# Altium PCB BlasterV1.3L64.PcbDoc
Units mm, origin at the board's own origin, x right, y up, seen from the top; angles counter-clockwise.
Board outline 45.95 x 23.95 mm, 2 copper layers (Top Layer, Bottom Layer); 22 components, 32 nets, 144 pads, 59 vias.
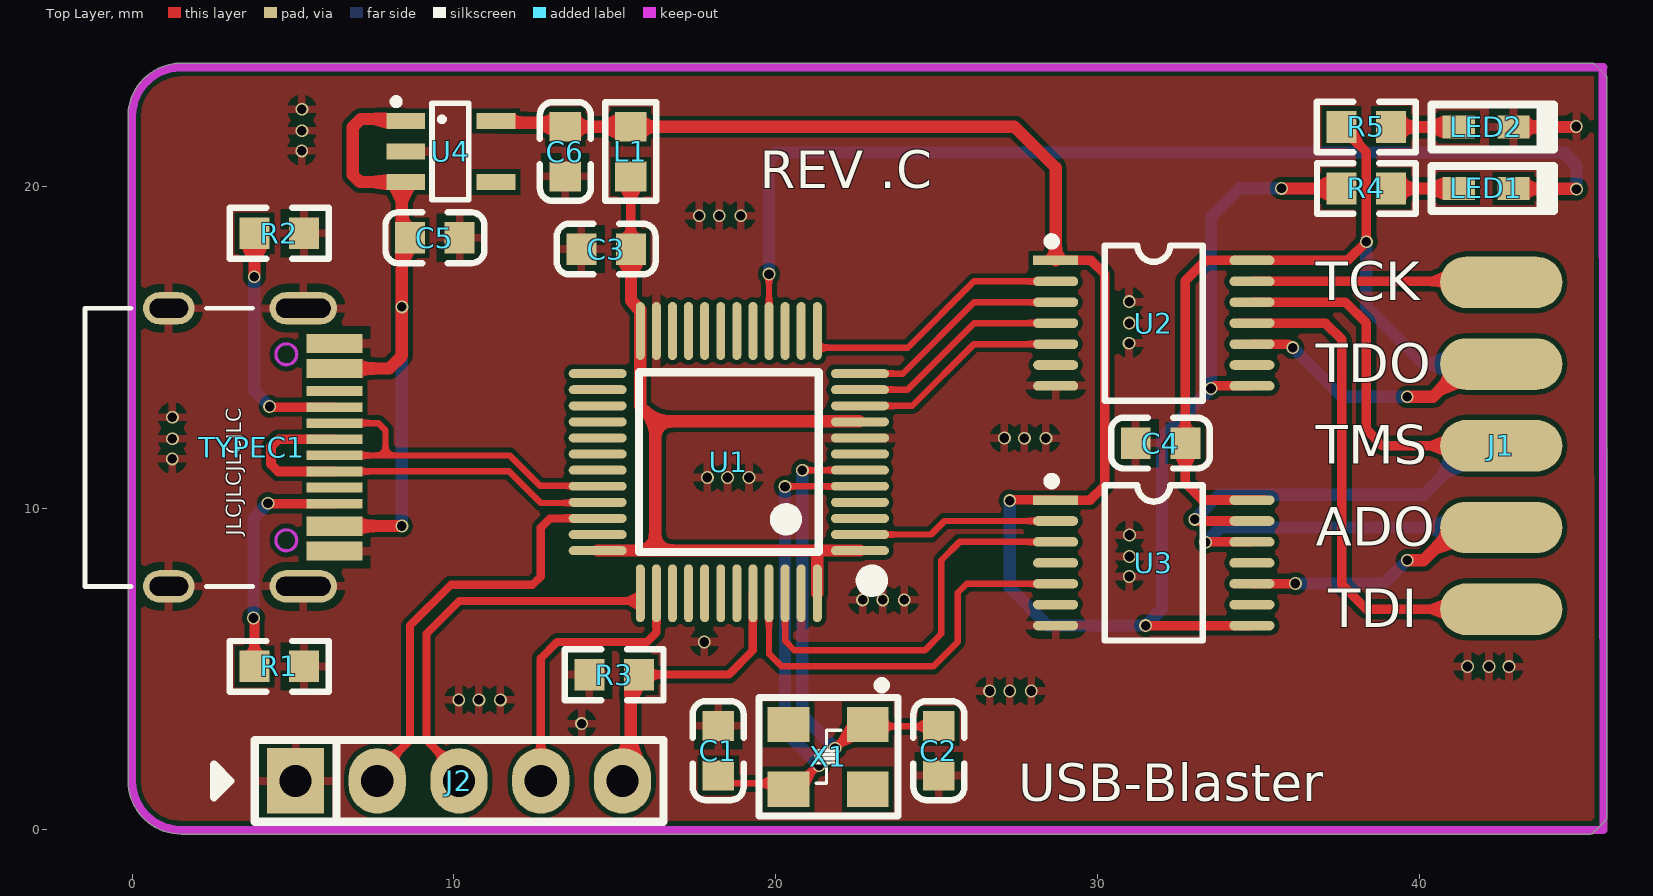
[diagram p0: Top Layer view]
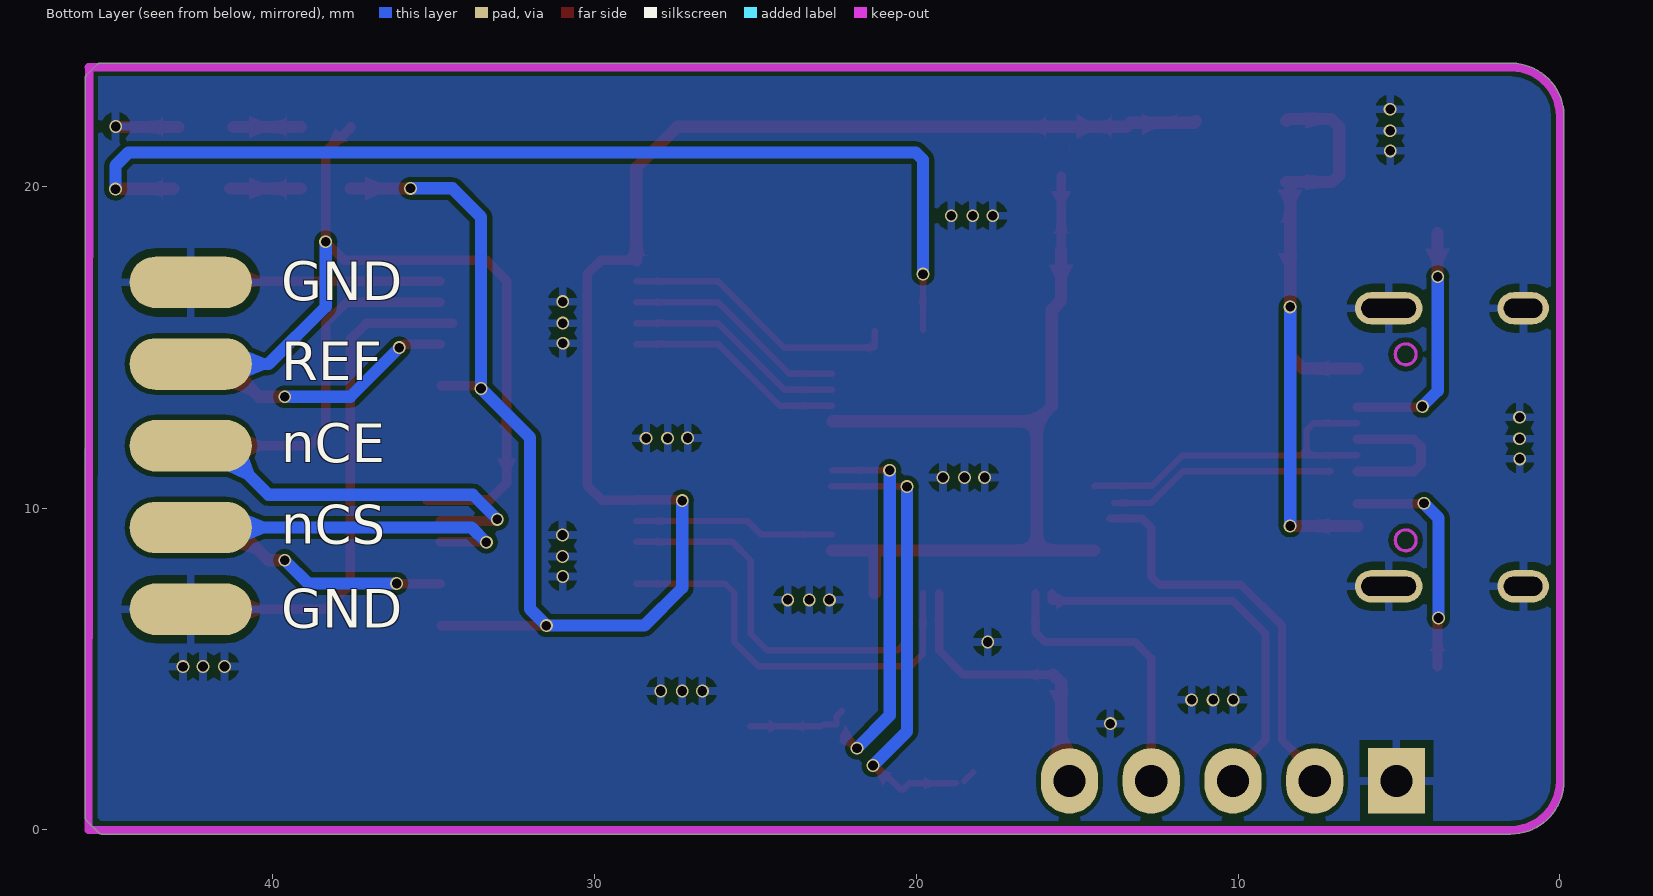
[diagram p1: Bottom Layer view, seen from below]
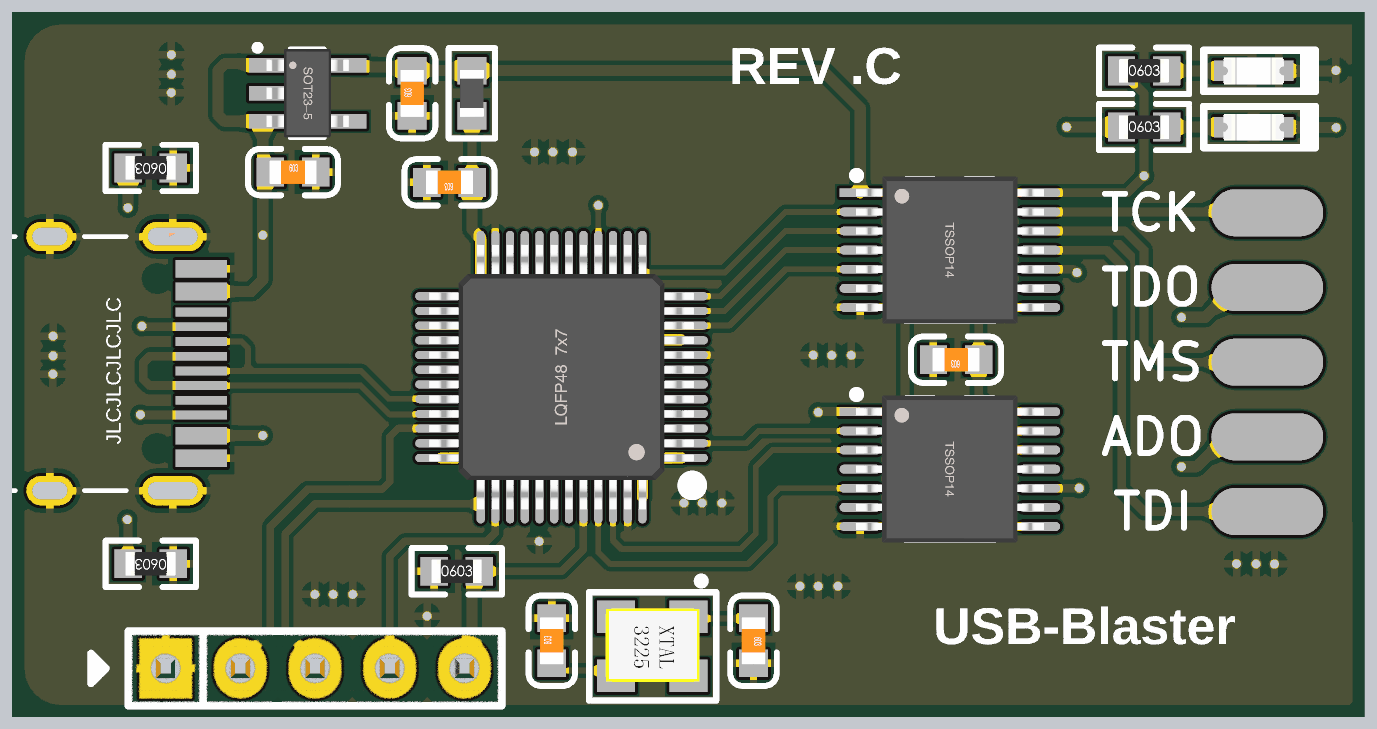
[diagram p2: 3D render of the assembled board from above, using the file's embedded part models]

## Layer stack, top to bottom
Top Solder: solder mask 0.0102, Solder Resist, Dk 3.5
Top Layer: signal copper 0.0356
Dielectric 1: dielectric 0.32, FR-4, Dk 4.8
Bottom Layer: signal copper 0.0356
Bottom Solder: solder mask 0.0102, Solder Resist, Dk 3.5

## Board outline
-0.127,1.524 -0.127,22.303 cw(c0,22.303) -0.118,22.351 cw(c1.524,22.176) 1.349,23.818 cw(c1.397,23.7) 1.397,23.827 45.368,23.827 cw(c45.368,23.7) 45.458,23.79 45.79,23.458 45.79,23.459 cw(c45.7,23.368) 45.827,23.368 45.827,0.381 cw(c45.7,0.381) 45.79,0.29 45.79,0.291 45.409,-0.09 45.41,-0.09 cw(c45.319,0) 45.319,-0.127 1.524,-0.127 cw(c1.524,1.524)

## Design rules (kind name [scope] priority, off if disabled: settings)
Clearance [All] p1: gap=0.15 ignorepadtopadclearanceinfootprint=FALSE
PolygonConnect [All] p1: connectstyle=Relief reliefconductorwidth=0.254 reliefentries=4 polygonreliefangle="90 Angle" airgapwidth=0.254
RoutingVias [All] p1: holewidth=0.711 width=1.27 viastyle="Through Hole" minholewidth=0.3 minwidth=0.4 maxholewidth=0.711 maxwidth=1.27
SolderMaskExpansion [All] p1: expansion=0.102 istentingtop=FALSE
SupplyNets "Schematic Supply Nets_3" [InNet('+5')] p1: voltage=0.000
SupplyNets "Schematic Supply Nets_2" [InNet('+3.3')] p2: voltage=0.000
SupplyNets "Schematic Supply Nets_1" [InNet('GND')] p3: voltage=0.000
SupplyNets "Schematic Supply Nets" [InNet('VREF')] p4: voltage=0.000
Width [All] p1: maxlimit=0.762 minlimit=0.2 preferedwidth=0.381
30 further rules are at their usual default settings.

## Components (designator, comment, footprint, x,y, rotation, side; value= is the part's Value field where it differs from the comment)
C1 "20pF" LC-0603_C 18.212,2.464 r90 top
C2 "20pF" LC-0603_C 25.07,2.464 r270 top
C3 "1uF" LC-0603_C 14.731,18.052 r180 top
C4 "1uF" LC-0603_C 31.959,12.021 r180 top
C5 "1uF" LC-0603_C 9.41,18.402 r0 top
C6 "1uF" LC-0603_C 13.462,21.082 r90 top
J1 "HDR2x5" HDR-M-2.54_2X5_SMT 42.545,11.938 r0 top locked
J2 "HDR1x5  DNP" PIN-5-2.54-1.0 10.16,1.524 r0 top locked
L1 "BLM21PG121SN1D" LC-0603_L 15.494,21.082 r270 top
LED1 "LED-A" LED-0603 42.076,19.933 r0 top
LED2 "LED-B" LED-0603 42.076,21.844 r0 top
R1 "5.1K" LC-0603_R 4.572,5.08 r180 top
R2 "5.1K" LC-0603_R 4.572,18.542 r180 top
R3 "5.1K" LC-0603_R 14.978,4.826 r0 top
R4 "1K" LC-0603_R 38.355,19.933 r0 top
R5 "1K" LC-0603_R 38.354,21.844 r0 top
TYPEC1 "TYPEC16P-SMD" TYPE-C-Receptacle-2.0 -1.459,11.89 r270 top locked
U1 "AGRV2KL48" "LQFP48 7X7_N" 18.542,11.43 r90 top
U2 "TXU0304" TSSOP14_N 31.75,15.748 r0 top
U3 "TXU0304" TSSOP14_N 31.748,8.3 r0 top
U4 "LP5907" SOT23-5N 9.906,21.082 r270 top
X1 "XTAL-3225" XTAL-3225 22.784,3.226 r270 top

## Footprints (in the part's own frame and the unit in brackets; to place one, negate y for a bottom-side part, rotate by r counter-clockwise, add the part's x,y. Pads: shape width x height; smd on the part's side, far side on the other; paste and mask are expansions set on the pad)
HDR-M-2.54_2X5_SMT [mm] "Pin Header"
  oval 3.8x1.6 smd: 1(0,5.08) 3(0,2.54) 5(0,0) 7(0,-2.54) 9(0,-5.08)
  oval 3.8x1.6 smd far side: 2(0,5.08) 4(0,2.54) 6(0,0) 8(0,-2.54) 10(0,-5.08)
LC-0603_C [mm]
  rect 0.93x0.98 smd: 1(-0.77,0) 2(0.77,0)
  silkscreen extent -1.53,-0.79 1.54,0.79, body extent -0.8,-0.4 0.8,0.4, height 0.3
LC-0603_L [mm]
  rect 0.93x0.98 smd: 1(-0.77,0) 2(0.77,0)
  silkscreen extent -1.53,-0.79 1.54,0.79, body extent -0.82,-0.41 0.83,0.41, height 0.46
LC-0603_R [mm]
  rect 0.93x0.98 smd: 1(-0.77,0) 2(0.77,0)
  silkscreen extent -1.53,-0.79 1.54,0.79, body extent -0.85,-0.4 0.85,0.4, height 0.56
LED-0603 [mm] "LED, SMD, 0603"
  rect 1x0.7 smd: 1(-0.85,0) 2(0.85,0)
  silkscreen extent -1.7,-0.7 2.1,0.7, body extent -1.03,-0.46 1.03,0.45, height 0.85
"LQFP48 7X7_N" [mm] "48脚，体宽7x7mm，脚距0.5mm"
  oval 0.279x1.8 smd: 1(-2.75,-4.075) 2(-2.25,-4.075) 3(-1.75,-4.075) 4(-1.25,-4.075) 5(-0.75,-4.075) 6(-0.25,-4.075) 7(0.25,-4.075) 8(0.75,-4.075) 9(1.25,-4.075) 10(1.75,-4.075) 11(2.25,-4.075) 12(2.75,-4.075) 25(2.75,4.075) 26(2.25,4.075) 27(1.75,4.075) 28(1.25,4.075) 29(0.75,4.075) 30(0.25,4.075) 31(-0.25,4.075) 32(-0.75,4.075) 33(-1.25,4.075) 34(-1.75,4.075) 35(-2.25,4.075) 36(-2.75,4.075)
  oval 1.8x0.279 smd: 13(4.075,-2.75) 14(4.075,-2.25) 15(4.075,-1.75) 16(4.075,-1.25) 17(4.075,-0.75) 18(4.075,-0.25) 19(4.075,0.25) 20(4.075,0.75) 21(4.075,1.25) 22(4.075,1.75) 23(4.075,2.25) 24(4.075,2.75) 37(-4.075,2.75) 38(-4.075,2.25) 39(-4.075,1.75) 40(-4.075,1.25) 41(-4.075,0.75) 42(-4.075,0.25) 43(-4.075,-0.25) 44(-4.075,-0.75) 45(-4.075,-1.25) 46(-4.075,-1.75) 47(-4.075,-2.25) 48(-4.075,-2.75)
  silkscreen extent -3.93,-4.69 2.79,2.79, body extent -4.5,-4.5 4.5,4.5, height 1.45
PIN-5-2.54-1.0 [mil] "Pin Header"
  rect 70x80 hole 39.37: 1(-200,0)
  oval 70x80 hole 39.37: 2(-100,0) 2(0,0) 4(100,0) 5(200,0)
  silkscreen extent -300,-50 250,50, body extent -250,-50 250,50, height 398
SOT23-5N [mm] "3x1.6x1.1mm(长宽高)"
  rect 0.5x1.2 smd: 1(-0.95,-1.4) 2(0,-1.4) 3(0.95,-1.4) 4(0.95,1.4) 5(-0.95,1.4)
  silkscreen extent -1.63,-1.78 1.5,0.56, body extent -1.5,-1.4 1.5,1.4, height 1.15
TSSOP14_N [mm] "5*6.4*1mm（长宽高）"
  rect 1.4x0.3 smd: 1(-3.05,1.95)
  oval 1.4x0.3 smd: 2(-3.05,1.3) 3(-3.05,0.65) 4(-3.05,0) 5(-3.05,-0.65) 6(-3.05,-1.3) 7(-3.05,-1.95) 8(3.05,-1.95) 9(3.05,-1.3) 10(3.05,-0.65) 11(3.05,0) 12(3.05,0.65) 13(3.05,1.3) 14(3.05,1.95)
  silkscreen extent -3.3,-2.41 1.52,2.67, body extent -3.2,-2.5 3.2,2.5, height 1.03
TYPE-C-Receptacle-2.0 [mm]
  oval 1x2.1 hole 0.6 slot 1.7 at 90 deg: 0(-4.32,6.78) 0(4.32,6.78)
  oval 1x1.6 hole 0.6 slot 1.2 at 90 deg: 0(-4.32,2.6) 0(4.32,2.6)
  rect 0.6x1.75 smd: A1(-3.225,7.75) A4(-2.45,7.75) B1(3.225,7.75) B4(2.45,7.75)
  rect 0.3x1.75 smd: A5(-1.25,7.75) A6(-0.25,7.75) A7(0.25,7.75) A8(1.25,7.75) B5(1.75,7.75) B6(0.75,7.75) B7(-0.75,7.75) B8(-1.75,7.75)
  Keep-Out Layer circle w0.1: c2.89,6.25 r0.325
  Keep-Out Layer circle w0.1: c-2.89,6.25 r0.325
  silkscreen extent -4.32,0 4.32,5.2
XTAL-3225 [mm]
  rect 1.1x1.3 smd: 1(-0.051,0.076) 2(-0.051,-2.388) 3(1.956,-2.388) 4(1.956,0.076)
  silkscreen extent -1.4,-3.3 2.79,1.02, body extent -0.34,-2.74 2.16,0.46, height 0.8

## Part data
C1 C2 C3 C4 C5 C6: library part CAP, "Capacitor"
J1: "Connector"
J2: library part HDR1x5
L1: library part INDUCTANCE, "Inductance"
LED1: library part LED
LED2: library part LED, "LED"
R1 R4 R5: library part RES, "Resistor"
R2 R3: library part RES
U4: library part LP5907MFX-3.3/NOPB, Symbol=LP5907MFX-3.3/NOPB
X1: library part XTAL-4P, Symbol=XL2EL89CSI-KPIYLC-8M
U1: Symbol=AGRV2KL48_C41397168
U2 U3: Symbol=GTXU0304TD

## Via types
v1: diameter 0.4, hole 0.3, Top Layer to Bottom Layer, tented both sides, 59 vias

## Nets (pads, with @x,y where several pads share a name; then routed paths per layer and width w, separated by ;. In a path a pad name is that pad's centre, name@x,y a point inside that pad or via, vN(x,y) a via of type N, cw(c..) or ccw(c..) an arc to the next point about the centre after c; other vN are vias at no path point)
+3.3: C6.2 L1.1 R4.1 U2.1 U2.8 U3.1 U3.8 U4.5 | length 62.2
  Top Layer w0.3: v1@27.266,10.255 28.698,10.255 U3.1@28.703,10.255 ; U3.1 29.766,10.25 30.226,10.71 30.226,17.272 29.8,17.698 U2.1@28.71,17.698 ; v1(31.496,6.35) U3.8@34.757,6.35 ; v1(33.528,13.716) 33.555,13.716 33.637,13.798 U2.8@34.76,13.798
  Top Layer w0.381: U4.5 11.365,21.973 13.341,21.973 C6.2 27.424,21.852 28.7,20.576 U2.1 ; v1@35.759,19.922 35.77,19.933 R4.1
  Bottom Layer w0.381: v1(27.273,10.233) 27.273,7.525 28.448,6.35 v1(31.496,6.35) 31.496,6.355 32.004,6.863 32.004,12.192 v1(33.528,13.716) 33.528,19.05 34.415,19.937 v1(35.719,19.937)
+5: C5.1 TYPEC1.A4 TYPEC1.B4 U4.1 U4.3 | length 21.6
  Top Layer w0.381: TYPEC1.B4 6.293,9.442 8.379,9.442 v1(8.381,9.445) ; TYPEC1.A4 7.99,14.34 8.382,14.732 v1(8.382,16.256) 8.382,20.072 U4.3@8.441,20.132 ; U4.3 U4.3@8.441,20.132 ; U4.1 8.447,22.091 7.105,22.091 6.858,21.844 6.858,20.355 7.081,20.132 U4.3@8.441,20.132
  Bottom Layer w0.381: v1(8.381,9.445) v1(8.382,16.256)
ASDO: J1.7 U3.10 | length 8.5
  Top Layer w0.3: U3.10 36.144,7.65 v1(36.149,7.656)
  Top Layer w0.381: v1(39.624,8.382) 40.132,8.382 40.962,9.212 42.359,9.212 J1.7
  Bottom Layer w0.381: v1(36.149,7.656) 38.898,7.656 v1(39.624,8.382)
BOOT0: J2.5 R3.2 U1.44 | length 9.4
  Top Layer w0.254: R3.2 18.542,4.826 19.287,5.571 19.287,7.35 U1.44
  Top Layer w0.381: J2.5 15.494,1.778 15.494,4.572 R3.2
  Bottom Layer w0.381: J2.5 J2.5@15.24,1.778
DN: TYPEC1.A7 TYPEC1.B7 U1.32 | length 11
  Top Layer w0.2: TYPEC1.B7 7.658,12.64 7.874,12.424 7.874,11.635 ; TYPEC1.A7@6.296,11.64 7.104,11.64 7.108,11.635 7.874,11.635 ; U1.32 14.451,10.695 12.673,10.695 11.733,11.635 7.874,11.635
DP: TYPEC1.A6 TYPEC1.B6 U1.33 | length 11.8
  Top Layer w0.2: TYPEC1.B6@7.118,11.141 11.719,11.141 12.7,10.16 U1.33@13.852,10.16
  Top Layer w0.3: TYPEC1.B6 4.541,11.14 4.318,11.363 4.318,11.917 4.541,12.14 TYPEC1.A6
GND: C1.2 C2.2 C3.2 C4.2 C5.2 C6.1 J1.2 J1.10 J2.1 LED2.2 R1.1 R2.1 R3.1 TYPEC1.0 TYPEC1.A1 TYPEC1.B1 U1.8 U1.23 U1.47 U2.7 U3.7 U4.2 | length 2
  Top Layer w0.381: LED2.2 44.857,21.844 44.872,21.859 v1(44.877,21.859)
  other v1: 13.97,3.302 10.152,4.041 10.776,4.041 11.444,4.041 26.648,4.318 27.272,4.318 27.94,4.318 41.496,5.08 42.164,5.08 42.788,5.075 17.78,5.842 22.703,7.148 23.327,7.148 23.994,7.148 30.988,7.874 30.993,8.498 30.993,9.166 17.876,10.95 18.5,10.95 19.168,10.95 1.245,11.532 1.25,12.156 27.104,12.178 27.728,12.172 28.396,12.172 1.25,12.824 30.983,15.124 30.988,15.748 30.988,16.416 17.623,19.086 18.247,19.086 18.914,19.086 5.271,21.102 5.276,21.726 5.276,22.394
IO-ASDO: U1.45 U3.5 | length 12.9
  Top Layer w0.2: U1.45 19.792,5.471 20.183,5.08 24.892,5.08 25.654,5.842 25.654,7.366 25.938,7.65 U3.5
IO-NCE: U1.2 U3.2 | length 6.3
  Top Layer w0.2: U1.2 24.825,9.18 25.245,9.6 U3.2
IO-NCS: U1.46 U3.3 | length 12.7
  Top Layer w0.2: U1.46 20.292,5.87 20.574,5.588 24.638,5.588 25.146,6.096 25.146,8.382 25.714,8.95 U3.3
IO-TCK: U1.13 U2.2 | length 8.8
  Top Layer w0.2: U1.13 21.292,15.023 21.329,14.986 24.1,14.986 26.162,17.048 U2.2
IO-TDI: U1.11 U2.4 | length 6.9
  Top Layer w0.2: U1.11 24.094,13.68 24.13,13.716 26.162,15.748 U2.4
IO-TDO: U1.10 U2.5 | length 6.9
  Top Layer w0.2: U1.10 24.244,13.18 26.162,15.098 U2.5
IO-TMS: U1.12 U2.3 | length 7
  Top Layer w0.2: U1.12 23.944,14.18 26.162,16.398 U2.3
JTCK: J2.2@10.16,1.524 U1.37 | length 12.3
  Top Layer w0.254: J2.2@10.16,1.524 10.16,1.778 9.144,2.794 9.144,6.096 10.165,7.117 15.78,7.117 15.792,7.129 U1.37
JTMS: J2.2@7.62,1.524 U1.34 | length 12.9
  Top Layer w0.254: J2.2@7.62,1.524 7.62,1.778 8.636,2.794 8.636,6.35 9.906,7.62 12.446,7.62 12.7,7.874 12.7,9.398 12.985,9.683 U1.34@13.97,9.683
LED1: LED1.2 U1.16 | length 33.2
  Top Layer w0.2: U1.16@19.792,15.544 v1(19.792,17.272)
  Top Layer w0.381: LED1.2@43.082,19.922 44.871,19.922 44.878,19.914 v1(44.883,19.914)
  Bottom Layer w0.381: v1(19.792,17.272) 19.792,20.828 20.015,21.052 44.48,21.052 44.883,20.649 v1(44.883,19.914)
MCU3V3: C3.1 L1.2 U1.1 U1.9 U1.24 U1.36 U1.48 | length 27.8
  Top Layer w0.3: C3.1@15.494,18.052 L1.2
  Top Layer w0.381: U1.36 16.256,8.68 ; C3.1 15.501,16.455 15.792,16.164 15.792,13.164 16.256,12.7 ; U1.48 21.292,8.636 21.336,8.68 ; U1.9@22.598,12.7 16.256,12.7 ; U1.1 21.336,8.68 ; 16.256,8.68 16.256,12.7 ; 16.256,8.68 21.336,8.68
nCE: J1.6 U3.13 | length 12.3
  Top Layer w0.3: v1(33.02,9.652) 33.047,9.652 33.099,9.6 U3.13
  Bottom Layer w0.381: v1(33.02,9.652) 33.782,10.414 40.132,10.414 41.656,11.938 J1.6
nCS: J1.8 U3.12 | length 10.8
  Top Layer w0.3: v1@33.361,8.95 U3.12
  Bottom Layer w0.381: v1(33.361,8.938) 33.821,9.398 J1.8
NetC1_1: C1.1 U1.5 X1.3 | length 14.7
  Top Layer w0.2: C1.1@18.231,1.793 C1.1@18.506,1.518 ; 18.754,1.448 20.218,1.448 X1.3 20.496,1.27 X1.3@20.946,1.72 ; v1(20.288,10.668) 20.294,10.674 U1.5@22.637,10.674
  Top Layer w0.254: X1.3@20.937,1.633 v1@21.227,1.923
  Bottom Layer w0.381: v1(20.288,10.668) 20.288,3.058 v1(21.345,2.001)
NetC2_1: C2.1 U1.6 X1.1 | length 14.5
  Top Layer w0.2: v1(20.828,11.176) 20.83,11.178 U1.6@22.606,11.178 ; X1.1@22.31,3.698 22.479,3.529 22.479,3.277 X1.1 ; X1.1@22.969,3.22 C2.1@25.155,3.22
  Top Layer w0.254: v1(21.844,2.54) X1.1@22.243,2.939
  Bottom Layer w0.381: v1(20.828,11.176) 20.828,3.556 v1(21.844,2.54)
NetLED1_1: LED1.1 R4.2 | length 2.2
  Top Layer w0.381: R4.2 LED1.1@41.315,19.933
NetLED2_1: LED2.1 R5.2 | length 2.1
  Top Layer w0.381: R5.2 LED2.1
NetR1_2: R1.2 TYPEC1.B5 | length 7.3
  Top Layer w0.3: R1.2 v1@3.802,6.604 ; v1@4.237,10.136 5.474,10.136 5.478,10.14 TYPEC1.B5@6.287,10.14
  Bottom Layer w0.381: v1(3.773,6.587) 3.773,9.697 4.222,10.146 v1(4.222,10.151)
NetR2_2: R2.2 TYPEC1.A5 | length 7.5
  Top Layer w0.3: v1(4.275,13.16) 4.302,13.16 4.322,13.14 TYPEC1.A5
  Top Layer w0.381: v1@3.802,17.28 R2.2
  Bottom Layer w0.381: v1(3.794,17.191) 3.794,13.646 4.275,13.165 v1(4.275,13.16)
TCK: J1.1 U2.13 | length 7.8
  Top Layer w0.3: U2.13 42.515,17.048 J1.1
TDI: J1.9 U2.11 | length 16.3
  Top Layer w0.3: U2.11@34.41,15.742 37.09,15.742 37.592,15.24 37.592,7.62 38.354,6.858 J1.9
TDO: J1.3 U2.10 | length 8.8
  Top Layer w0.3: U2.10 35.929,15.098 36.041,14.986 v1(36.068,14.986)
  Top Layer w0.381: v1(39.624,13.462) 40.429,13.462 41.445,14.478 J1.3
  Bottom Layer w0.381: v1(36.068,14.986) 37.592,13.462 v1(39.624,13.462)
TMS: J1.5 U2.12 | length 11.5
  Top Layer w0.3: U2.12 37.704,16.398 38.354,15.748 38.354,12.446 38.862,11.938 J1.5
UART_TX: J2.4 U1.38 | length 9.1
  Top Layer w0.2: J2.4@12.568,1.656 J2.4
  Top Layer w0.254: J2.4 12.7,5.334 13.208,5.842 16.002,5.842 16.292,6.132 U1.38
VREF: C4.1 J1.4 R5.1 U2.14 U3.14 | length 26
  Top Layer w0.3: U3.14@35.209,10.253 33.26,10.253 32.729,10.784 C4.1 32.729,17.071 33.356,17.698 U2.14 37.776,17.698 v1(38.354,18.276) ; R5.1 37.584,21.819 37.899,21.504 37.924,21.504 38.354,21.074 v1@38.354,18.288
  Bottom Layer w0.381: v1@38.354,18.288 38.354,16.256 40.132,14.478 J1.4
pads on no net: TYPEC1.A8 TYPEC1.B8 U1.3 U1.4 U1.7 U1.14 U1.15 U1.17 U1.18 U1.19 U1.20 U1.21 U1.22 U1.25 U1.26 U1.27 U1.28 U1.29 U1.30 U1.31 U1.35 U1.39 U1.40 U1.41 U1.42 U1.43 U2.6 U2.9 U3.4 U3.6 U3.9 U3.11 U4.4 X1.2 X1.4

## Polygon pours and split planes (outlines as drawn)
GND on Bottom Layer "GND_L02_P000" (solid, remove dead copper, pour order 0): -0.127,1.524 -0.127,22.303 cw(c0,22.303) -0.118,22.351 cw(c1.524,22.176) 1.349,23.818 cw(c1.397,23.7) 1.397,23.827 45.368,23.827 cw(c45.368,23.7) 45.458,23.79 45.79,23.458 45.79,23.459 cw(c45.7,23.368) 45.827,23.368 45.827,0.381 cw(c45.7,0.381) 45.79,0.29 45.79,0.291 45.409,-0.09 45.41,-0.09 cw(c45.319,0) 45.319,-0.127 1.524,-0.127 cw(c1.524,1.524)
GND on Top Layer "GND_L01_P001" (solid, remove dead copper, pour order 1): -0.127,1.524 -0.127,22.303 cw(c0,22.303) -0.118,22.351 cw(c1.524,22.176) 1.349,23.818 cw(c1.397,23.7) 1.397,23.827 45.368,23.827 cw(c45.368,23.7) 45.458,23.79 45.79,23.458 45.79,23.459 cw(c45.7,23.368) 45.827,23.368 45.827,0.381 cw(c45.7,0.381) 45.79,0.29 45.79,0.291 45.409,-0.09 45.41,-0.09 cw(c45.319,0) 45.319,-0.127 1.524,-0.127 cw(c1.524,1.524)

## Keep-outs
Keep-Out Layer:
  lines w0.254: 0,22.176 cw(c1.524,22.176) 1.524,23.7 ; 0,22.303 0,1.524 ; 1.397,23.7 45.72,23.7 ; 45.7,23.7 45.72,0 1.524,0 ; 0,1.524 ccw(c1.524,1.524) 1.524,0 ; 0,1.524 ccw(c1.524,1.524) 1.524,0

## Silkscreen, mask and mechanical layers (free items; w line width, h text height)
Top Overlay:
  text "REV .C" at 19.506,19.551 h2
  text "TCK" at 36.776,16.456 h1.2
  text "TDO" at 36.776,13.916 h1.2
  text "TMS" at 36.776,11.376 h1.2
  text "JLCJLCJLCJLC" at 3.548,9.142 h0.8 r90
  text "ADO" at 36.776,8.836 h1.2
  text "TDI" at 37.176,6.296 h1.2
  text "USB-Blaster" at 27.533,0.501 h2
Bottom Overlay:
  text "GND" at 39.732,16.456 h1.2
  text "REF" at 39.732,13.97 h1.2
  text "nCE" at 39.732,11.43 h1.2
  text "nCS" at 39.732,8.89 h1.2
  text "GND" at 39.732,6.287 h1.2